# Altium PCB SONDE_PCB.PcbDoc
Units mil, origin at the board's own origin, x right, y up, seen from the top; angles counter-clockwise.
Board outline 3641.73 x 1968.5 mil, 4 copper layers (Top Layer, GND, PWR, Bottom Layer), stack 23.034 mil thick; 71 components, 36 nets, 196 pads, 49 vias.
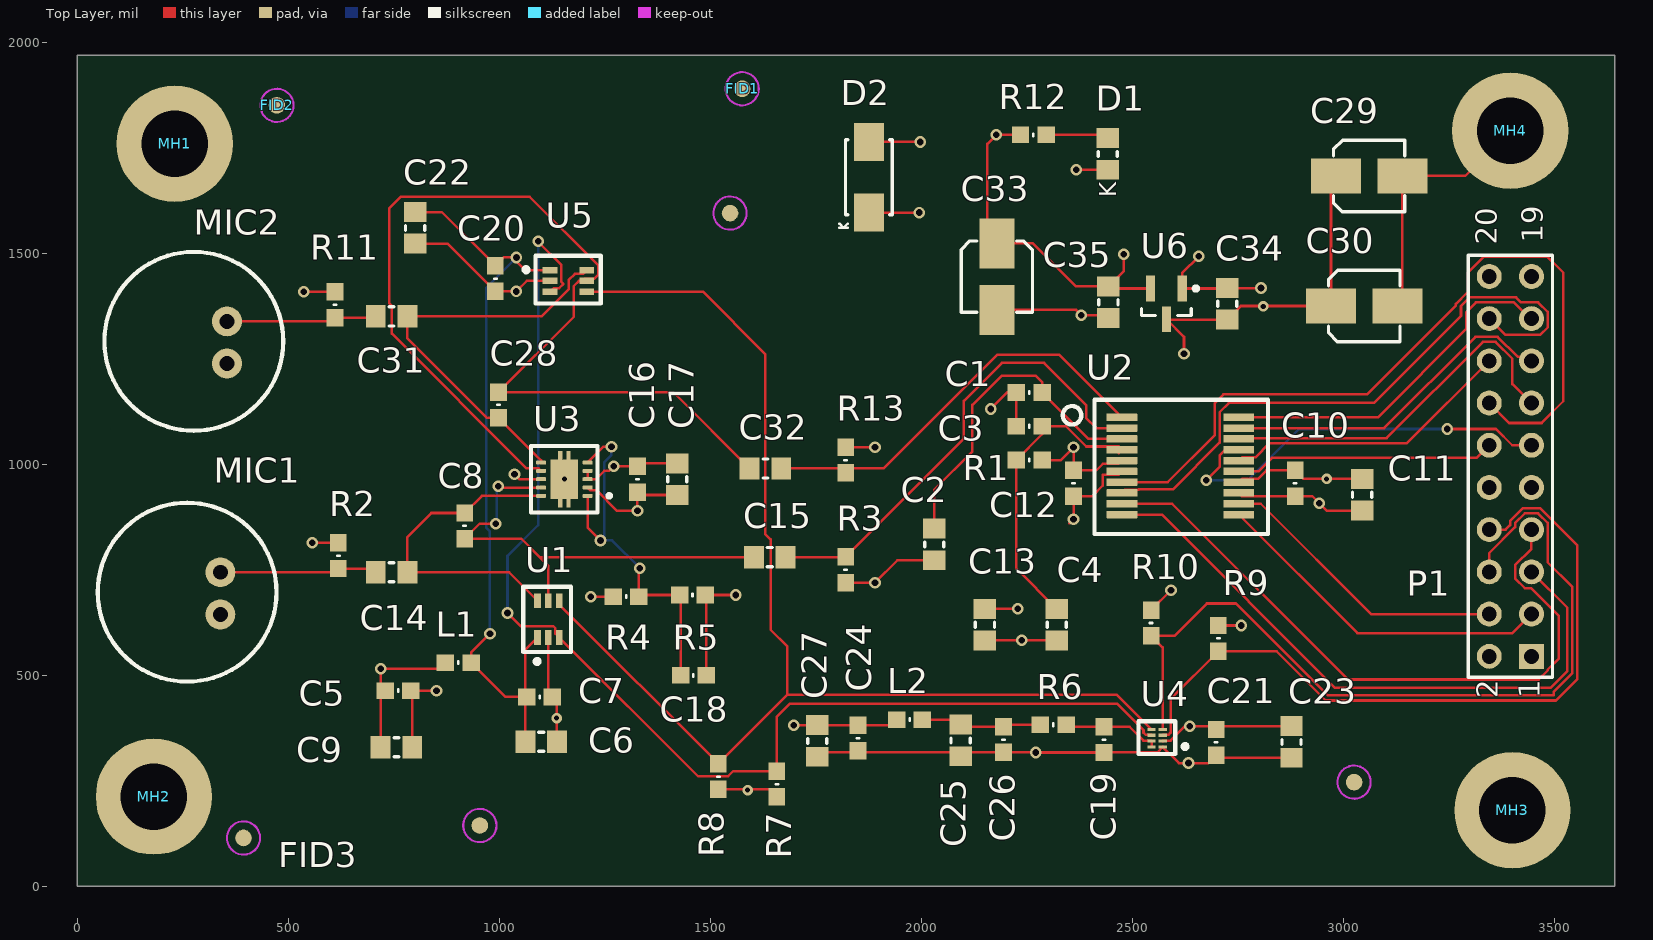
[diagram p0: Top Layer view]
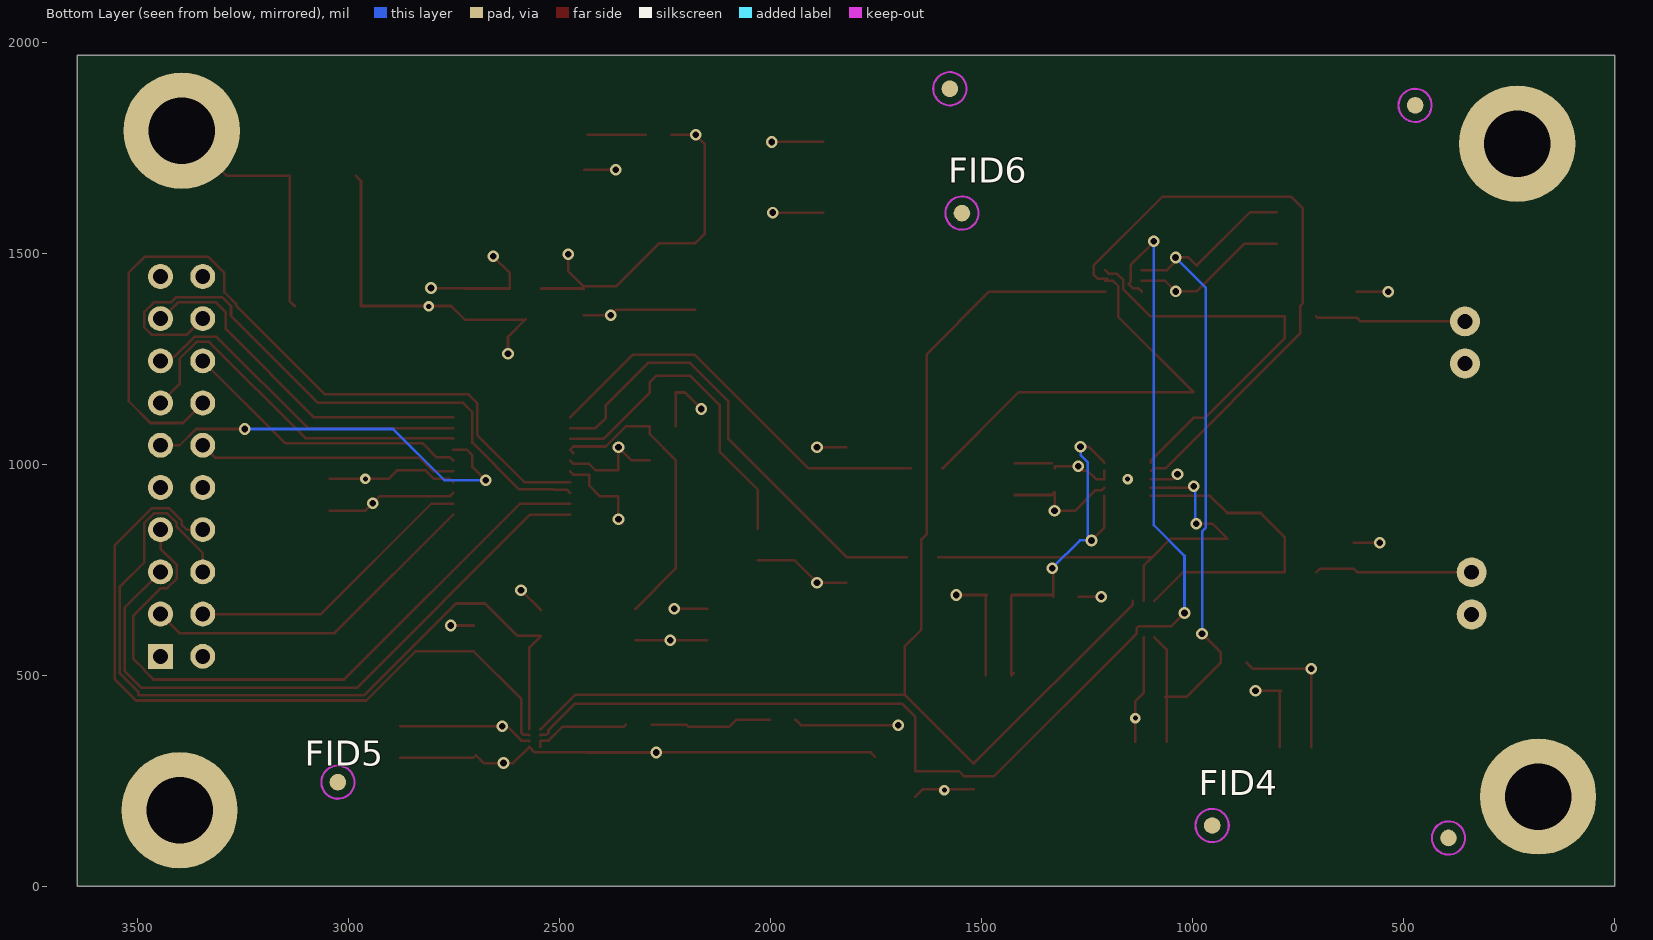
[diagram p1: Bottom Layer view, seen from below]
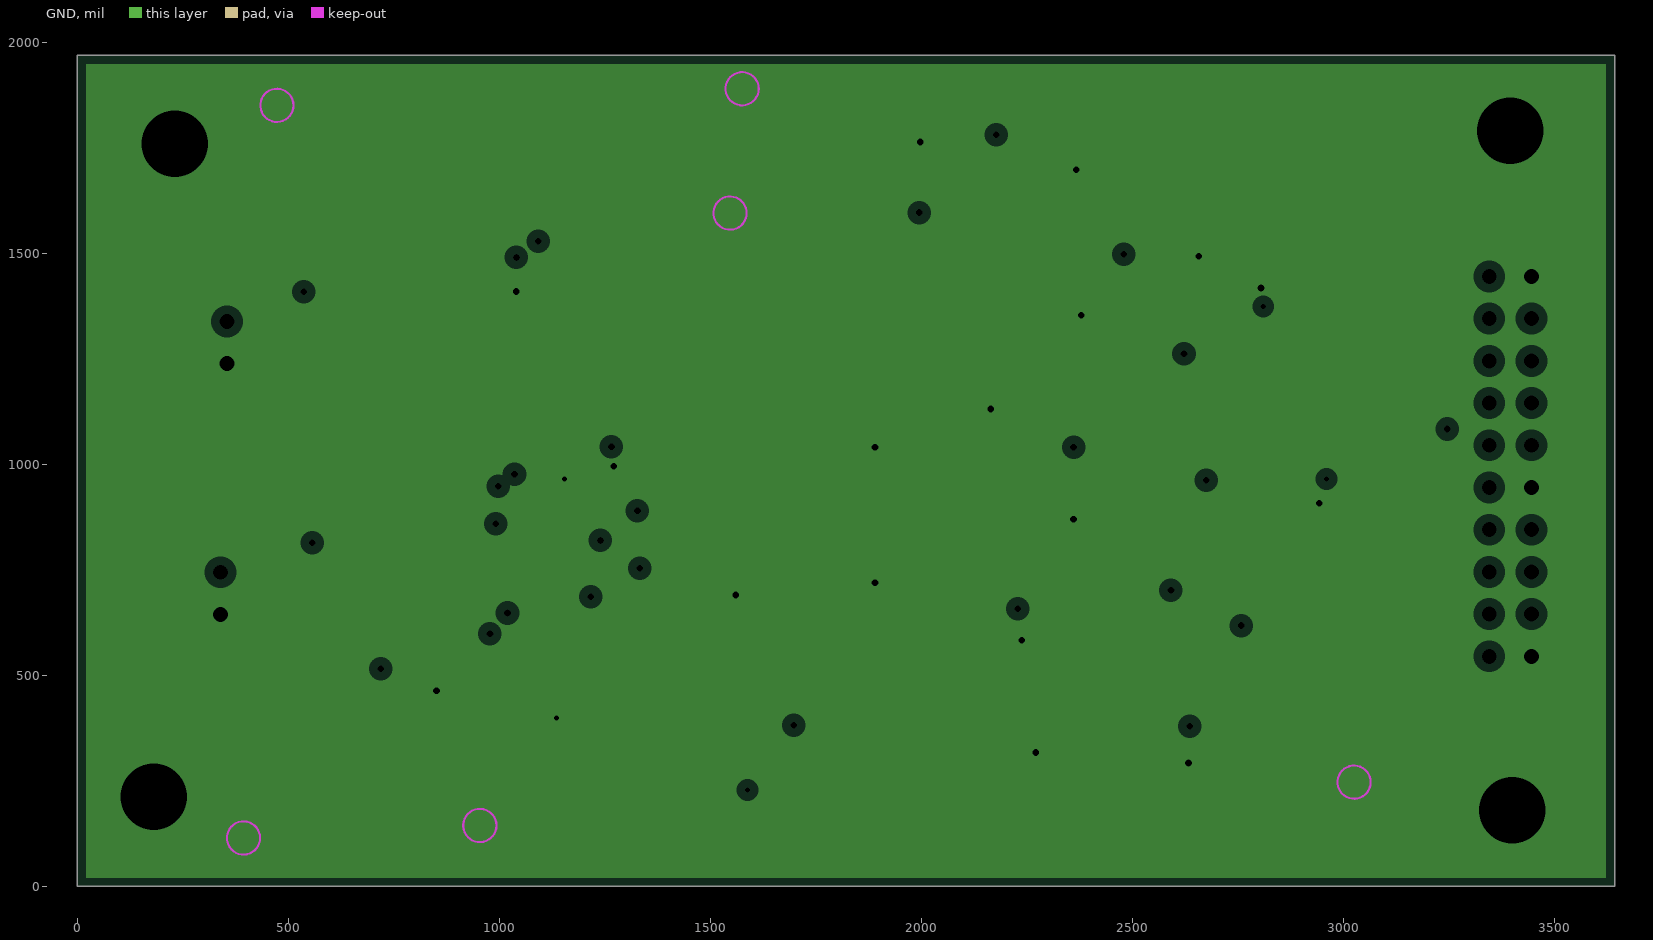
[diagram p2: GND, clearances drawn from the general rule]
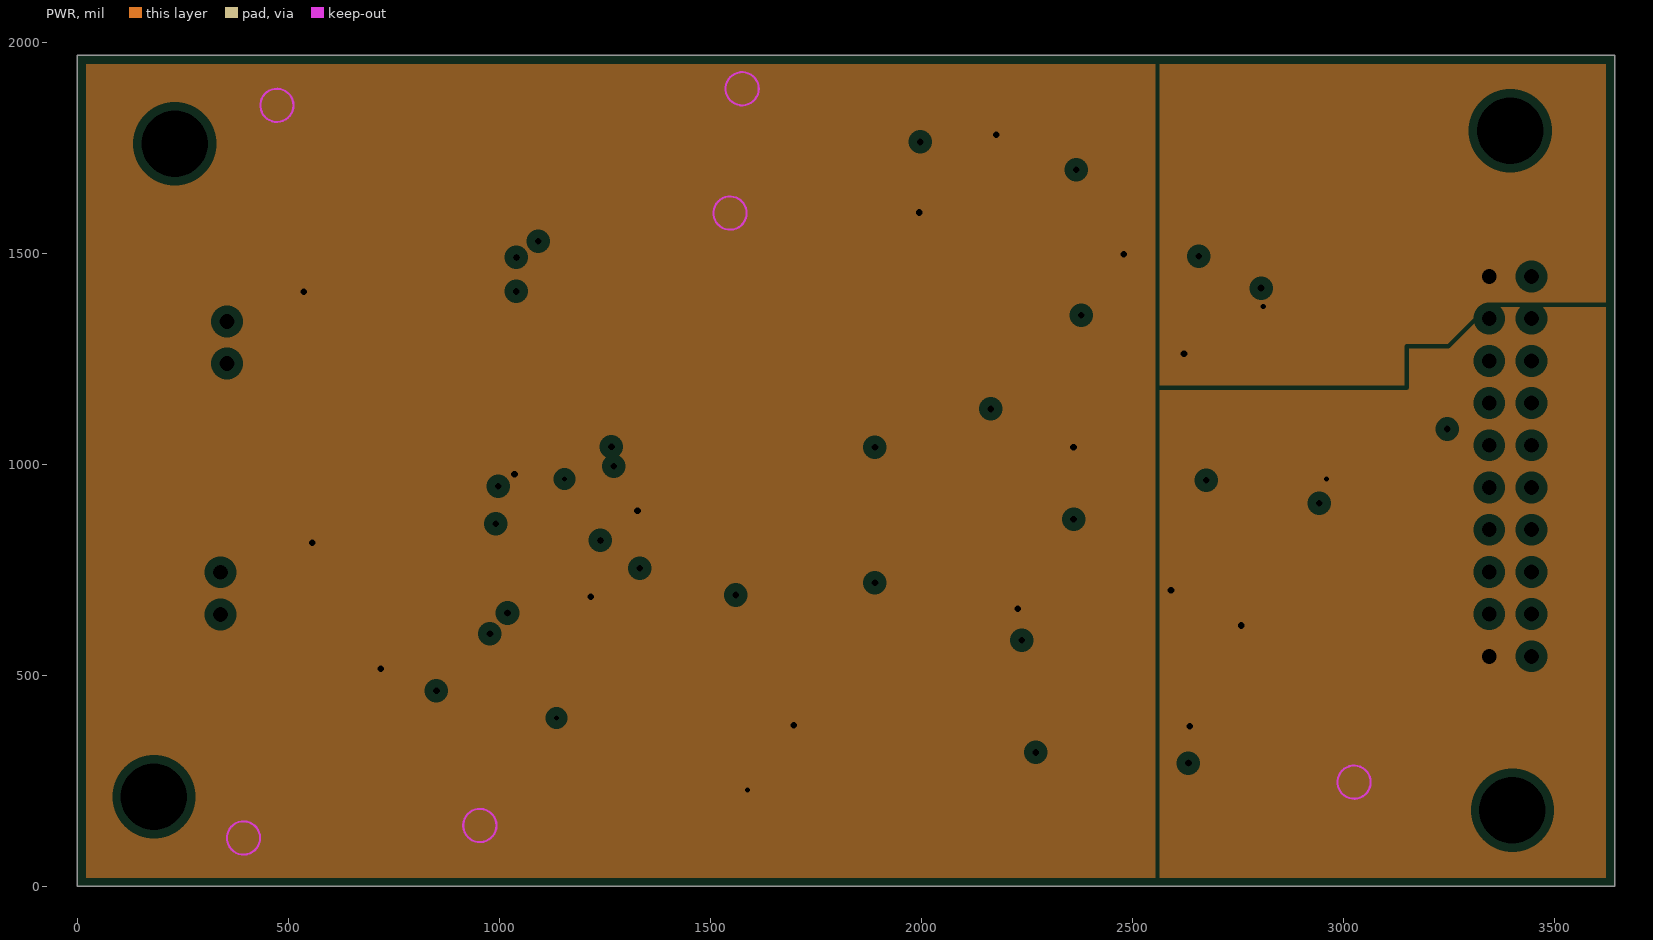
[diagram p3: PWR, clearances drawn from the general rule]

## Layer stack, top to bottom
Top Solder: solder mask 0.4, Solder Resist, Dk 3.5
Top Layer: signal copper 1.4
Dielectric 2: core 4, Dk 4.2
GND: plane copper 1.417, net GND
Dielectric 1: prepreg 3.4, FR-4, Dk 4.2
PWR: plane copper 1.417, net +5VA
Dielectric 3: dielectric 10, Dk 4.2
Bottom Layer: signal copper 1.4
Bottom Solder: solder mask 0.4, Solder Resist, Dk 3.5

## Board outline
0,0 0,1968.5 3641.73,1968.5 3641.73,0

## Design rules (kind name [scope] priority, off if disabled: settings)
Clearance [All] p1: gap=6 except(8: Via-Via)
PlaneClearance [All] p1: clearance=20
PlaneConnect [All] p1: planeconnectstyle=Relief reliefexpansion=20 reliefentries=4 reliefconductorwidth=10 reliefairgap=10
PolygonConnect [All] p1: connectstyle=Relief reliefconductorwidth=10 reliefentries=4 polygonreliefangle="90 Angle" airgapwidth=10
RoutingVias [All] p1: holewidth=15.75 width=0 viastyle="Through Hole" minholewidth=15.75 minwidth=27.56 maxholewidth=15.75 maxwidth=27.56
SolderMaskExpansion [All] p1: expansion=4
Width [All] p1: maxlimit=10 minlimit=6 preferedwidth=6 minimp=50.000000 maximp=50.000000 favimp=50.000000
28 further rules are at their usual default settings.

## Components (designator, comment, footprint, x,y, rotation, side; value= is the part's Value field where it differs from the comment)
C1 "Capacitor" 0603 2255,1170 r0 top
C2 "Capacitor" 0805 2030,810 r90 top
C3 "Capacitor" 0603 2255,1090 r0 top
C4 "Capacitor" 0805 2320,620 r90 top
C5 "Capacitor" 0603 759.47,463.59 r0 top
C6 "Capacitor" 0805 1098.48,342.3 r0 top
C7 "Capacitor" 0603 1094.81,448.67 r0 top
C8 "Capacitor" 0603 917.29,854.03 r270 top
C9 "Capacitor" 0805 755.81,329.34 r0 top
C10 "Capacitor" 0603 2885,955 r270 top
C11 "Capacitor" 0805 3043.57,927.79 r270 top
C12 "Capacitor" 0603 2360,955 r270 top
C13 "Capacitor" 0805 2150,620 r270 top
C14 "Capacitor" 0805 744.09,744.09 r0 top
C15 "Capacitor" 0805 1640,780 r0 top
C16 "Capacitor" 0603 1326.77,964.57 r90 top
C17 "Capacitor" 0805 1421.26,964.57 r90 top
C18 "Capacitor" 0603 1459.49,500 r0 top
C19 "Capacitor" 0603 2432.25,347.56 r270 top
C20 "Capacitor" 0603 990,1440 r270 top
C21 "Capacitor" 0603 2697.81,340.98 r270 top
C22 "Capacitor" 0805 800,1560 r270 top
C23 "Capacitor" 0805 2876.4,342.01 r270 top
C24 "Capacitor" 0603 1849.35,351.32 r270 top
C25 "Capacitor" 0805 2092.3,345.56 r270 top
C26 "Capacitor" 0603 2194.1,347.65 r270 top
C27 "Capacitor" 0805 1752.64,344.42 r270 top
C28 "Capacitor" 0603 997.63,1140.49 r90 top
C29 "Capacitor_Polarized" CAP_RAD_SMD_DIA157 3060.39,1683.09 r0 top
C30 "Capacitor_Polarized" CAP_RAD_SMD_DIA157 3048.74,1375 r0 top
C31 "Capacitor" 0805 744.09,1350.39 r0 top
C32 "Capacitor" 0805 1630,990 r0 top
C33 "Capacitor_Polarized" CAP_RAD_SMD_DIA157 2178.29,1444.45 r270 top
C34 "Capacitor" 0805 2724.12,1380.14 r90 top
C35 "Capacitor" 0805 2442.58,1383.92 r270 top
D1 "Diode_LED" 0805_LED 2440.93,1735.18 r90 top
D2 "Diode_zener" DIODE_DO-214AC/SMA 1875,1680 r90 top
FID1 "Fiducial 1mm" FID_1MM 1574.8,1889.76 r90 top
FID2 "Fiducial 1mm" FID_1MM 472.44,1850.39 r90 top
FID3 "Fiducial 1mm" FID_1MM 393.33,114.53 r90 top
FID4 "Fiducial 1mm" FID_1MM 953.33,144.1 r90 bottom
FID5 "Fiducial 1mm" FID_1MM 3024.68,246.8 r90 bottom
FID6 "Fiducial 1mm" FID_1MM 1546.15,1595.11 r90 bottom
L1 "Ferrite" 0603 902.26,529.9 r0 top
L2 "Ferrite" 0603 1971.4,395.07 r0 top
MH1 "Mounting Hole 6-32" MH_ENG_6-32 230.07,1759.59 r0 top
MH2 "Mounting Hole 6-32" MH_ENG_6-32 181.1,212.6 r0 top
MH3 "Mounting Hole 6-32" MH_ENG_6-32 3400,180 r0 top
MH4 "Mounting Hole 6-32" MH_ENG_6-32 3395,1790 r0 top
MIC1 "CMA-4544PF-W" MIC 338.58,744.09 r270 top
MIC2 "CMA-4544PF-W" MIC 354.33,1338.58 r270 top
P1 "Header 10X2" HDR2X10 3445,545 r90 top
R1 "Resistor" 0603 2255,1010 r0 top
R2 "Resistor" 0603 618.11,783.46 r270 top
R3 "Resistor" 0603 1820,750 r90 top
R4 "Resistor" 0603 1299.69,686.3 r180 top
R5 "Resistor" 0603 1457.17,690.24 r180 top
R6 "Resistor" 0603 2311.84,382.75 r0 top
R7 "Resistor" 0603 1657.06,242.25 r90 top
R8 "Resistor" 0603 1518.38,259.99 r90 top
R9 "Resistor" 0603 2703.27,587.41 r270 top
R10 "Resistor" 0603 2543.72,623.9 r270 top
R11 "Resistor" 0603 610.24,1377.95 r270 top
R12 "Resistor" 0603 2264.85,1780.61 r180 top
R13 "Resistor" 0603 1820,1010 r270 top
U1 "MCP4018" 6-TSSOP 1090,590 r90 top
U2 "PCM180" 20-SSOP 2612.48,995.98 r0 top
U3 "OPA1622" 10-VFDFN 1153.54,964.57 r180 top
U4 "PCA9306" 8-XFDFN 2571.14,330.26 r90 top
U5 "MCP4018" 6-TSSOP 1120,1460 r0 top
U6 "MCP1700" SOT23_132 2580,1380 r270 top

## Footprints (in the part's own frame and the unit in brackets; to place one, negate y for a bottom-side part, rotate by r counter-clockwise, add the part's x,y. Pads: shape width x height; smd on the part's side, far side on the other; paste and mask are expansions set on the pad)
6-TSSOP [mm]
  rect 0.9x0.4 smd paste-0.025 mask+0.05: 1(0,0) 2(0,-0.65) 3(0,-1.3) 4(2.2,-1.3) 5(2.2,-0.65) 6(2.2,0)
  silkscreen extent -1.47,-2.01 3.05,0.86, body extent -0.03,-1.63 2.17,0.37, height 1.1
8-XFDFN [mm]
  rect 0.19x0.508 smd paste-0.025 mask+0.05: 1(0,0) 2(0.35,0) 3(0.7,0) 4(1.05,0) 5(1.05,0.67) 6(0.7,0.67) 7(0.35,0.67) 8(0,0.67)
  silkscreen extent -0.43,-1.37 1.55,1.45, body extent -0.19,-0.24 1.26,0.9, height 0.13
10-VFDFN [mm]
  rrect50% 0.6x0.24 smd paste-0.025 mask+0.05: 1(-1.4,1) 2(-1.4,0.5) 3(-1.4,0) 4(-1.4,-0.5) 5(-1.4,-1) 6(1.4,-1) 7(1.4,-0.5) 8(1.4,0) 9(1.4,0.5) 10(1.4,1)
  rrect5% 0.25x0.5 smd paste-0.025 mask+0.05: 11(-0.25,1.45) 11(-0.25,-1.45) 11(0.25,1.45) 11(0.25,-1.45)
  rrect5% 1.65x2.4 smd paste-0.025 mask+0.05: 11(0,0)
  silkscreen extent -2.8,-2 2,2, body extent -1.56,-1.56 1.56,1.56, height 1
20-SSOP [mm]
  rrect10% 1.85x0.45 smd paste-0.025 mask+0.05: 1(-3.5,2.925) 2(-3.5,2.275) 3(-3.5,1.625) 4(-3.5,0.975) 5(-3.5,0.325) 6(-3.5,-0.325) 7(-3.5,-0.975) 8(-3.5,-1.625) 9(-3.5,-2.275) 10(-3.5,-2.925) 11(3.53,-2.925) 12(3.53,-2.275) 13(3.53,-1.625) 14(3.53,-0.975) 15(3.53,-0.325) 16(3.53,0.325) 17(3.53,0.975) 18(3.53,1.625) 19(3.53,2.275) 20(3.53,2.925)
  silkscreen extent -7.06,-4.09 5.28,3.99, body extent -3.92,-3.65 3.98,3.65, height 1.79
0603 [mm]
  rect 1.05x1 smd: 1(-0.775,0) 2(0.775,0)
  silkscreen extent 0,-0.08 0,0.08, body extent -0.85,-0.47 0.85,0.48, height 0.55
0805 [mm]
  rect 1.2x1.35 smd: 1(-0.95,0) 2(0.95,0)
  silkscreen extent -0.15,-0.58 0.15,0.57, body extent -1.1,-0.68 1.1,0.67, height 0.65
0805_LED [mm]
  rect 1.2x1.35 smd: A(0.95,0) K(-0.95,0)
  silkscreen extent -0.15,-0.58 0.15,0.58, body extent -1.1,-0.67 1.1,0.67, height 0.65
CAP_RAD_SMD_DIA157 [mm]
  rect 3x2.1 smd: +(-2,0) -(2,0)
  silkscreen extent -2.15,-2.15 2.15,2.15, body extent -2.13,-2.15 2.15,2.15, height 5.2
DIODE_DO-214AC/SMA [mm]
  rect 2.3x1.8 smd: A(2.125,0) K(-2.125,0)
  silkscreen extent -3.05,-1.4 2.25,1.78, body extent -2.25,-1.39 2.25,1.4, height 2.29
FID_1MM [mm] "Fiducial 1mm diameter - Exposed 2mm"
  round 1 all layers, no hole paste-1 mask+0.5: 0(0,0)
  Keep-Out Layer circle w0.127: c0,0 r1
HDR2X10 [mm] "Connector; Header; 10x2 Position"
  rect 1.5x1.5 hole 0.9: 1(0,0)
  round 1.5 hole 0.9: 2(0,2.54) 3(2.54,0) 4(2.54,2.54) 5(5.08,0) 6(5.08,2.54) 7(7.62,0) 8(7.62,2.54) 9(10.16,0) 10(10.16,2.54) 11(12.7,0) 12(12.7,2.54) 13(15.24,0) 14(15.24,2.54) 15(17.78,0) 16(17.78,2.54) 17(20.32,0) 18(20.32,2.54) 19(22.86,0) 20(22.86,2.54)
  silkscreen extent -1.27,-1.27 24.13,3.81
MH_ENG_6-32 [mm] "Mounting hole - Imperial 6-32"
  round 7 hole 4: 1(0,0)
MIC [mm]
  round 1.8 hole 0.9 paste-0.025 mask+0.05: 1(0,0) 2(2.54,0)
  silkscreen extent -4.18,-7.38 6.58,3.38, body extent -3.65,-6.9 6.05,2.8, height 5.2
SOT23_132 [mm]
  rect 1.55x0.55 smd: 1(-0.925,0.95) 2(-0.925,-0.95) 3(0.925,0)
  silkscreen extent -1.05,-1.5 0.7,1.9, body extent -0.7,-1.5 0.7,1.5, height 1.2

## Part data
C29 C30 C33: "Capacitor"
D1: "LED"
D2: "Diode"
FID1 FID2 FID3 FID4 FID5 FID6: library part FID_1MM, "FID - 1MM"
MH1 MH2 MH3 MH4: library part MH_6-32, "MH - Mounting Hole 6-32"
P1: "Header, 10-Pin, Dual row"
U3: "Dual amplifier (headphone driver)"
U6: "Linear voltage regulator"

## Via types
v1: diameter 27.56, hole 15.75, Top Layer to Bottom Layer, 44 vias
v2: diameter 25, hole 12, Top Layer to Bottom Layer, 5 vias

## Nets (pads, with @x,y where several pads share a name; then routed paths per layer and width w, separated by ;. In a path a pad name is that pad's centre, name@x,y a point inside that pad or via, vN(x,y) a via of type N, cw(c..) or ccw(c..) an arc to the next point about the centre after c; other vN are vias at no path point)
3V3: C10.1 C11.1 C21.1 C23.1 P1.2 R9.1 R10.1 U2.14 U4.2 | length 752.4
  Top Layer w6: R10.1 v1(2590.79,701.49) ; U4.2 2572.18,345.08 2590.14,345.08 2624.47,379.41 v1(2635.21,379.41) C23.1 ; R9.1 v1(2757.07,617.92) ; U2.14 2759.19,965.33 2796.87,965.33 2817.06,985.51 C10.1 2905.32,965.2 C11.1
  other v2: 2959.66,965.39
5V0: C5.1 C9.1 C12.1 C13.1 C16.1 C17.1 C24.1 C27.1 C33.+ C35.1 D2.K L1.1 L2.1 R1.2 R2.1 R4.2 R7.1 R8.1 R11.1 R12.2 U2.5 U3.2 U3.8 U6.2 | length 2590.2
  Top Layer w6: v1(536.42,1408.46) R11.1 ; v1(556.1,813.98) R2.1 ; C9.1 v1(718.41,515.83) 857.67,515.83 L1.1 ; v1@1035.43,972.44 v1(1035.43,976.38) 1047.24,964.57 U3.8 ; U3.2 1214.62,938.92 1229.47,938.92 1278.63,889.76 v1(1326.77,889.76) C16.1 1333.66,927.17 C17.1 ; v1@1210,680 v1(1216.3,686.3) R4.2 ; R8.1 1639.31,229.48 R7.1 ; v1(1697.05,381.82) C27.1 C24.1@1849.34,381.82 ; C24.1 1927.65,381.83 L2.1 ; D2.K v1(1994.44,1596.34) v1@1996.48,1594.3 ; C13.1 v1(2227.4,657.4) ; R12.2 v1(2177.26,1780.61) 2155.68,1759.02 2155.68,1545.81 C33.+ 2263.64,1523.19 2365.51,1421.32 C35.1 2479.23,1457.98 v1(2479.23,1497.74) ; R1.2 2330,1010 v1(2360,1040) C12.1 2413.73,985.51 2429.27,1001.05 2466.95,1001.05 U2.5 ; C35.1@2442.58,1414.43 2444.57,1416.42 U6.2
  other v2: 1587.76,227.82
5V_CONVERTER: C25.1 C26.1 L2.2 R6.1 | length 288.3
  Top Layer w6: L2.2 2080.19,395.08 C25.1 2097.1,378.16 C26.1 2198.68,382.75 R6.1
5V_POTENTIOMETER: C6.1 C7.1 C20.1 C22.1 L1.2 U1.1 U5.1 | length 1836
  Top Layer w6: C22.1 863.11,1597.4 C20.1 1009.49,1490 v1(1040,1490) 1040,1480 1060,1460 U5.1 ; v1(977.33,598.73) 932.77,554.18 L1.2 1014.01,448.67 C7.1@1061.08,448.67 ; C6.1 C7.1@1061.08,448.67 ; C7.1 C7.1@1061.08,448.67 ; U1.1 1061.08,561.08 C7.1@1061.08,448.67
  Bottom Layer w6: v1(977.33,598.73) 977.33,840.59 968.02,849.9 968.02,1418.02 v1(1040,1490)
GND: C1.1 C2.1 C3.1 C4.1 C5.2 C6.2 C7.2 C9.2 C10.2 C11.2 C12.2 C13.2 C16.2 C17.2 C18.2 C19.2 C20.2 C21.2 C22.2 C23.2 C24.2 C25.2 C26.2 C27.2 C29.- C30.- C33.- C34.2 C35.2 D1.K D2.A MH1.1 MH2.1 MH3.1 MH4.1 MIC1.2 MIC2.2 P1.1 P1.9 P1.19 R3.1 R5.1 R13.1 U1.2 U2.6 U2.13 U3.3 U3.4 U3.11 U4.1 U5.2 U6.1 | length 5021.3
  Top Layer w6: C5.2 v1(850.55,463.6) ; C9.2 C5.2@793.21,460.37 ; C22.2 876.89,1522.6 C20.2 v1(1039.49,1409.49) 1064.41,1434.41 U5.2 ; U1.2 1115.59,458.41 C7.2 1135.89,438.11 C6.2 ; U3.4 U3.3 1228.35,964.57 1248.03,984.25 1259.84,984.25 v1(1270.67,995.08) C16.2 C16.2@1326.77,990.21 ; C16.2@1333.66,1001.97 C17.2 ; C18.2 1490,687.91 R5.1 v1(1559.76,690.24) ; C27.2 1762.76,317.14 C26.2 v1(2270.73,317.14) 2270.82,317.05 C19.2 2432.72,317.52 2558.49,317.52 2571.14,330.17 U4.1 2609.36,292.04 v1(2632.23,292.04) 2679.38,292.04 C21.2 2703.66,304.61 C23.2 ; R3.1 v1(1889.49,719.49) 1942.6,772.6 C2.1 ; R13.1 v1(1889.49,1040.51) v1@1890,1040 ; D2.A v1(1996.85,1763.66) v1@2002.98,1769.78 ; C13.2 v1(2237.4,582.6) C4.1 ; v1(2163.61,1131.01) 2202.6,1170 C1.1 C3.1 ; C33.- 2366.31,1365.71 v1(2378.61,1353.41) C35.2@2442.58,1353.41 ; 2350,860 v1(2360,870) C12.2 2404.6,924.49 2429.27,949.16 2429.27,975.46 2466.95,975.46 U2.6 ; v1(2366.72,1697.78) D1.K ; v1(2656.82,1492.59) 2617.4,1453.17 U6.1 C34.2@2723,1416.42 ; C34.2 v1(2804.21,1417.55) v1@2806.97,1420.3 ; U2.13 2758.98,924.49 C10.2 2925.51,924.49 v1(2942.4,907.6) 2959.61,890.39 C11.2 ; C30.- 3139.13,1386.65 C29.- 3288.08,1683.08 MH4.1
  other v2: 1135.41,398.38 1153.54,964.57
IO2: P1.18 U2.8 | length 1469.4
  Top Layer w6: U2.8 2482.42,939.74 2514.31,939.74 2515,940.43 2595.31,940.43 2706.04,1051.16 2706.04,1123.21 2728.02,1145.18 3071.4,1145.18 3278,1351.79 3278,1374.99 3298.54,1395.53 3408.5,1395.53 3420.5,1383.53 3460.96,1383.53 3483.53,1360.96 3483.53,1324.4 3465.6,1306.47 3383.53,1306.47 P1.18
IO4: P1.15 U2.19 | length 806.8
  Top Layer w6: U2.19 3095.55,1085.55 3312,1302 3364.97,1302 3412,1254.97 3435.03,1254.97 P1.15
IO5: P1.12 U2.15 | length 619.1
  Top Layer w6: U2.15 2797.76,983.19 2829.75,1015.18 3315.18,1015.18 P1.12
IO12: P1.16 U2.16 | length 691.4
  Top Layer w6: U2.16 2759.19,1016.51 2791.08,1016.51 2824.57,1050 3150,1050 P1.16
IO13: P1.13 U2.18 | length 885.2
  Top Layer w6: U2.18 2751.46,1062 3102,1062 3330,1290 3360,1290 3400,1250 3400,1190 P1.13
IO14: P1.14 U2.7 | length 1876.8
  Top Layer w6: U2.7 2583.23,957.6 2694.04,1068.41 2694.04,1144.06 2715.34,1165.36 3055.25,1165.36 3266,1376.11 3266,1379.96 3293.57,1407.53 3293.57,1453.09 3332.64,1492.16 3481.91,1492.16 3520.24,1453.83 3520.24,1149.22 3468.8,1097.78 3392.23,1097.78 P1.14
IO15: P1.17 U2.20 | length 845.8
  Top Layer w6: U2.20 3081.14,1111.14 3290,1320 3290,1360 3313.53,1383.53 3403.53,1383.53 3442.06,1345 P1.17
IO18: P1.11 U2.17 | length 959
  Top Layer w6: v1(2674.72,962.42) 2706.04,993.74 2706.04,1021.06 2719.35,1034.37 U2.17 ; v1(3245.24,1083.53) 3360.96,1083.53 3399.49,1045 P1.11
  Bottom Layer w6: v1(2674.72,962.42) 2772.72,962.42 2893.83,1083.53 v1(3245.24,1083.53)
IO23: P1.3 U2.11 | length 828.5
  Top Layer w6: U2.11 3032.28,600 3400,600 P1.3
IO32: P1.7 U2.9 | length 1601.9
  Top Layer w6: U2.9 2593.58,906.42 3010,490 3461.78,490 3483.53,511.74 3483.53,513.53 3510,540 3510,640 3443.53,706.47 3429.04,706.47 3406.47,729.04 3406.47,760.96 3445,799.49 P1.7
IO33: P1.10
IO34: P1.6 R10.2 U4.4 | length 1997.8
  Top Layer w6: U4.4 2571.14,565.96 R10.2 2599.31,593.39 2676.04,670.12 2744.64,670.12 2962.51,452.25 3498.11,452.25 3498.11,461.13 3542,505.03 3542,708.87 3483.53,767.34 3483.53,860.96 3460.96,883.53 3429.04,883.53 3406.47,860.96 3406.47,850.83 3345,789.36 P1.6
IO35: P1.8 R9.2 U4.3 | length 1770
  Top Layer w6: U4.3 2572.18,358.86 2584.87,358.86 2590.14,364.14 2590.14,443.76 R9.2 2840.89,556.9 2957.53,440.25 3503.08,440.25 3554,491.17 3554,807.46 3465.93,895.53 3424.07,895.53 3394.47,865.93 3394.47,855.8 3383.67,845 P1.8
IO36: P1.4 U2.12 | length 701.8
  Top Layer w6: U2.12 2803.58,906.42 3065,645 P1.4
IO39: P1.5 U2.10 | length 1512.3
  Top Layer w6: U2.10 2569.17,880.83 2980,470 3490,470 3530,510 3530,660 P1.5
NetC1_2: C1.2 C2.2 U2.3 | length 790.1
  Top Layer w6: C2.2 2030,940 2120.4,1030.39 2120.4,1140.39 2190,1210 2270,1210 2285.51,1194.49 C1.2 2395.55,1059.96 U2.3
NetC3_2: C3.2 C4.2 R1.1 U2.4 | length 720.6
  Top Layer w6: C4.2 2224.49,752.91 R1.1 2285.51,1071.02 C3.2 2342.22,1090 2390.11,1042.1 2466.95,1042.1 U2.4 U2.4@2466.95,1026.64
NetC8_1: C8.1 C14.2 U1.6 U3.10 | length 777.2
  Top Layer w6: U1.6 1022.52,744.09 C14.2 781.5,827.36 838.68,884.54 C8.1 957.95,925.2 U3.10
NetC8_2: C8.2 C15.1 U1.5 U3.9 | length 1099.3
  Top Layer w6: v1(990.8,859.33) 953.11,859.33 C8.2 1051.62,823.52 1095.14,780 ; v1(996.96,947.98) 1000.05,944.88 U3.9 ; U1.5 1115.59,759.55 1095.14,780 ; C15.1 1095.14,780
  Bottom Layer w6: v1(990.8,859.33) 993.85,862.39 993.85,947.98 v1(996.96,947.98)
NetC14_1: C14.1 MIC1.1 R2.2 | length 375.4
  Top Layer w6: MIC1.1 609.25,744.09 R2.2 697.83,752.95 C14.1
NetC19_1: C19.1 R6.2 U4.7 U4.8 | length 232.2
  Top Layer w6: R6.2 2347.02,378.08 C19.1 2492.77,378.08 2525.76,345.08 2543.72,345.08 U4.7 U4.8
NetC28_1: C28.1 C31.2 U3.6 U5.6 | length 977.6
  Top Layer w6: U3.6 1098.43,1009.18 C28.1 969.81,1109.98 781.5,1298.29 C31.2 1099.89,1350.39 1163.74,1414.24 1163.74,1436.49 1178.53,1451.28 1197.9,1451.28 U5.6
NetC28_2: C28.2 C32.1 U3.7 U5.5 | length 2457
  Top Layer w6: U3.7 1092.46,990.21 1064.31,990.21 744.89,1309.64 744.89,1375.12 738.37,1381.64 738.37,1606.14 765.61,1633.38 1071.56,1633.38 1233.33,1471.6 1233.33,1448.4 1224.22,1439.28 1201.74,1439.28 U5.5 1188.13,1434.41 1175.74,1422.01 1175.74,1349.11 C28.2 1411.6,1171 C32.1
NetC31_1: C31.1 MIC2.1 R11.2 | length 355.9
  Top Layer w6: MIC2.1 601.38,1338.58 R11.2@609.25,1346.46 ; R11.2 703.74,1347.44 C31.1
NetD1_A: D1.A R12.1 | length 137.5
  Top Layer w6: R12.1 D1.A@2432.89,1780.61
SCL_POTENTIOMETER: R7.2 U1.3 U4.6 U5.3 | length 2950.2
  Top Layer w6: v1(1018.85,647.57) 1049.7,616.72 1127.19,616.72 1132.46,611.44 1132.46,598.72 U1.3 1470.35,260.83 1541.79,260.83 1553.71,272.76 R7.2 1657.06,401.97 1688.17,433.07 2462.58,433.07 2525.76,369.89 2525.76,364.14 2531.03,358.86 2543.72,358.86 U4.6 ; v1(1091.73,1528.03) 1091.73,1526.58 1146.72,1471.6 1146.72,1432.25 1151.44,1427.53 1141.44,1417.54 1128.72,1417.54 U5.3
  Bottom Layer w6: v1(1018.85,647.57) 1018.85,783.09 1091.73,855.98 v1(1091.73,1528.03)
SDA_POTENTIOMETER: R8.2 U1.4 U4.5 U5.4 | length 2983.3
  Top Layer w6: U1.4 1141.18,667.7 R8.2 1682.03,454.16 ; U5.4 1481.53,1408.82 1629.44,1260.91 1629.44,834.84 1642.24,822.04 1642.24,607.95 1682.03,568.15 1682.03,454.16 ; U4.5 2462.21,454.16 1682.03,454.16
V+: C29.+ C30.+ C34.1 P1.20 U6.3 | length 815.9
  Top Layer w6: v1(2621.74,1261.6) 2621.74,1301.84 U6.3 2580.84,1342.74 C34.1 2756.38,1375 C30.+ 2970,1671.44 C29.+
  other v2: 2809.48,1373.86
VOUT_ANAL: C15.2 R3.2 U2.2 | length 1121.8
  Top Layer w6: C15.2 1819.49,780 R3.2 2100,1060.51 2100,1150 2190,1240 2290,1240 2390,1140 2390,1110 2414.45,1085.55 U2.2
VOUT_ANAR: C32.2 R13.2 U2.1 | length 980.8
  Top Layer w6: C32.2 1910,990 2180,1260 2325.83,1260 U2.1
VREF: C18.1 R4.1 R5.2 U3.1 U3.5 | length 904.3
  Top Layer w6: U3.1 1208.66,849.79 v1(1239.05,819.4) ; U3.5 1246.59,1041.87 v1(1265.21,1041.87) ; R4.1 1330.2,751.54 v1(1332.5,753.84) ; R4.1@1334.13,690.24 R5.2 1428.98,687.91 C18.1 C18.1@1423.62,505.35
  Bottom Layer w6: v1(1265.21,1041.87) 1265.21,1021.83 1247.89,1004.51 1247.89,828.24 v1(1239.05,819.4) 1266.94,819.4 v1(1332.5,753.84)
pads on no net: FID1.0 FID2.0 FID3.0 FID4.0 FID5.0 FID6.0

## Polygon pours and split planes (outlines as drawn)
GND on GND (split plane): 3621.64,20.1 20.1,20.1 20.1,1948.41 3621.64,1948.41
V+ on PWR (split plane): 3621.64,1383.05 3346.46,1383.05 3344.51,1382.66 3342.85,1381.56 3245.92,1284.63 3149.61,1284.63 3147.66,1284.24 3146,1283.13 3144.9,1281.48 3144.51,1279.53 3144.51,1186.2 2564.15,1186.2 2564.15,1948.41 3621.64,1948.41
3V3 on PWR (split plane): 3621.64,20.1 2564.15,20.1 2564.15,1176 3149.61,1176 3151.56,1176.39 3153.21,1177.5 3154.32,1179.15 3154.7,1181.1 3154.7,1274.43 3248.03,1274.43 3249.98,1274.82 3251.64,1275.92 3348.57,1372.85 3621.64,1372.85
5V0 on PWR (split plane): 2553.96,1181.1 2553.96,20.1 20.1,20.1 20.1,1948.41 2553.96,1948.41

## Other copper
PWR (plane layer: these items are gaps in the copper):
  lines w10: 2559.06,0 2559.06,1181.1 ; 2559.06,1968.5 2559.06,1181.1 ; 3641.73,1377.95 3346.46,1377.95 3248.03,1279.53 3149.61,1279.53 3149.61,1181.1 2559.06,1181.1

## Text inside footprints (layer, text, board x,y; h text height)
D1: Top Overlay "K" at 2460.61,1632.82 h40 r90
P1: Top Overlay "2" at 3365,445 h50 r90; Top Overlay "1" at 3465,445 h50 r90; Top Overlay "19" at 3472.26,1524.48 h50 r90; Top Overlay "20" at 3362.29,1520.54 h50 r90